# Altium PCB PCB1.PcbDoc (part 4 of 12)
Units mm, origin at the board's own origin, x right, y up, seen from the top; angles counter-clockwise.
Board outline 122.17 x 121.67 mm, 2 copper layers (Top Layer, Bottom Layer); 274 components, 225 nets, 941 pads, 421 vias.
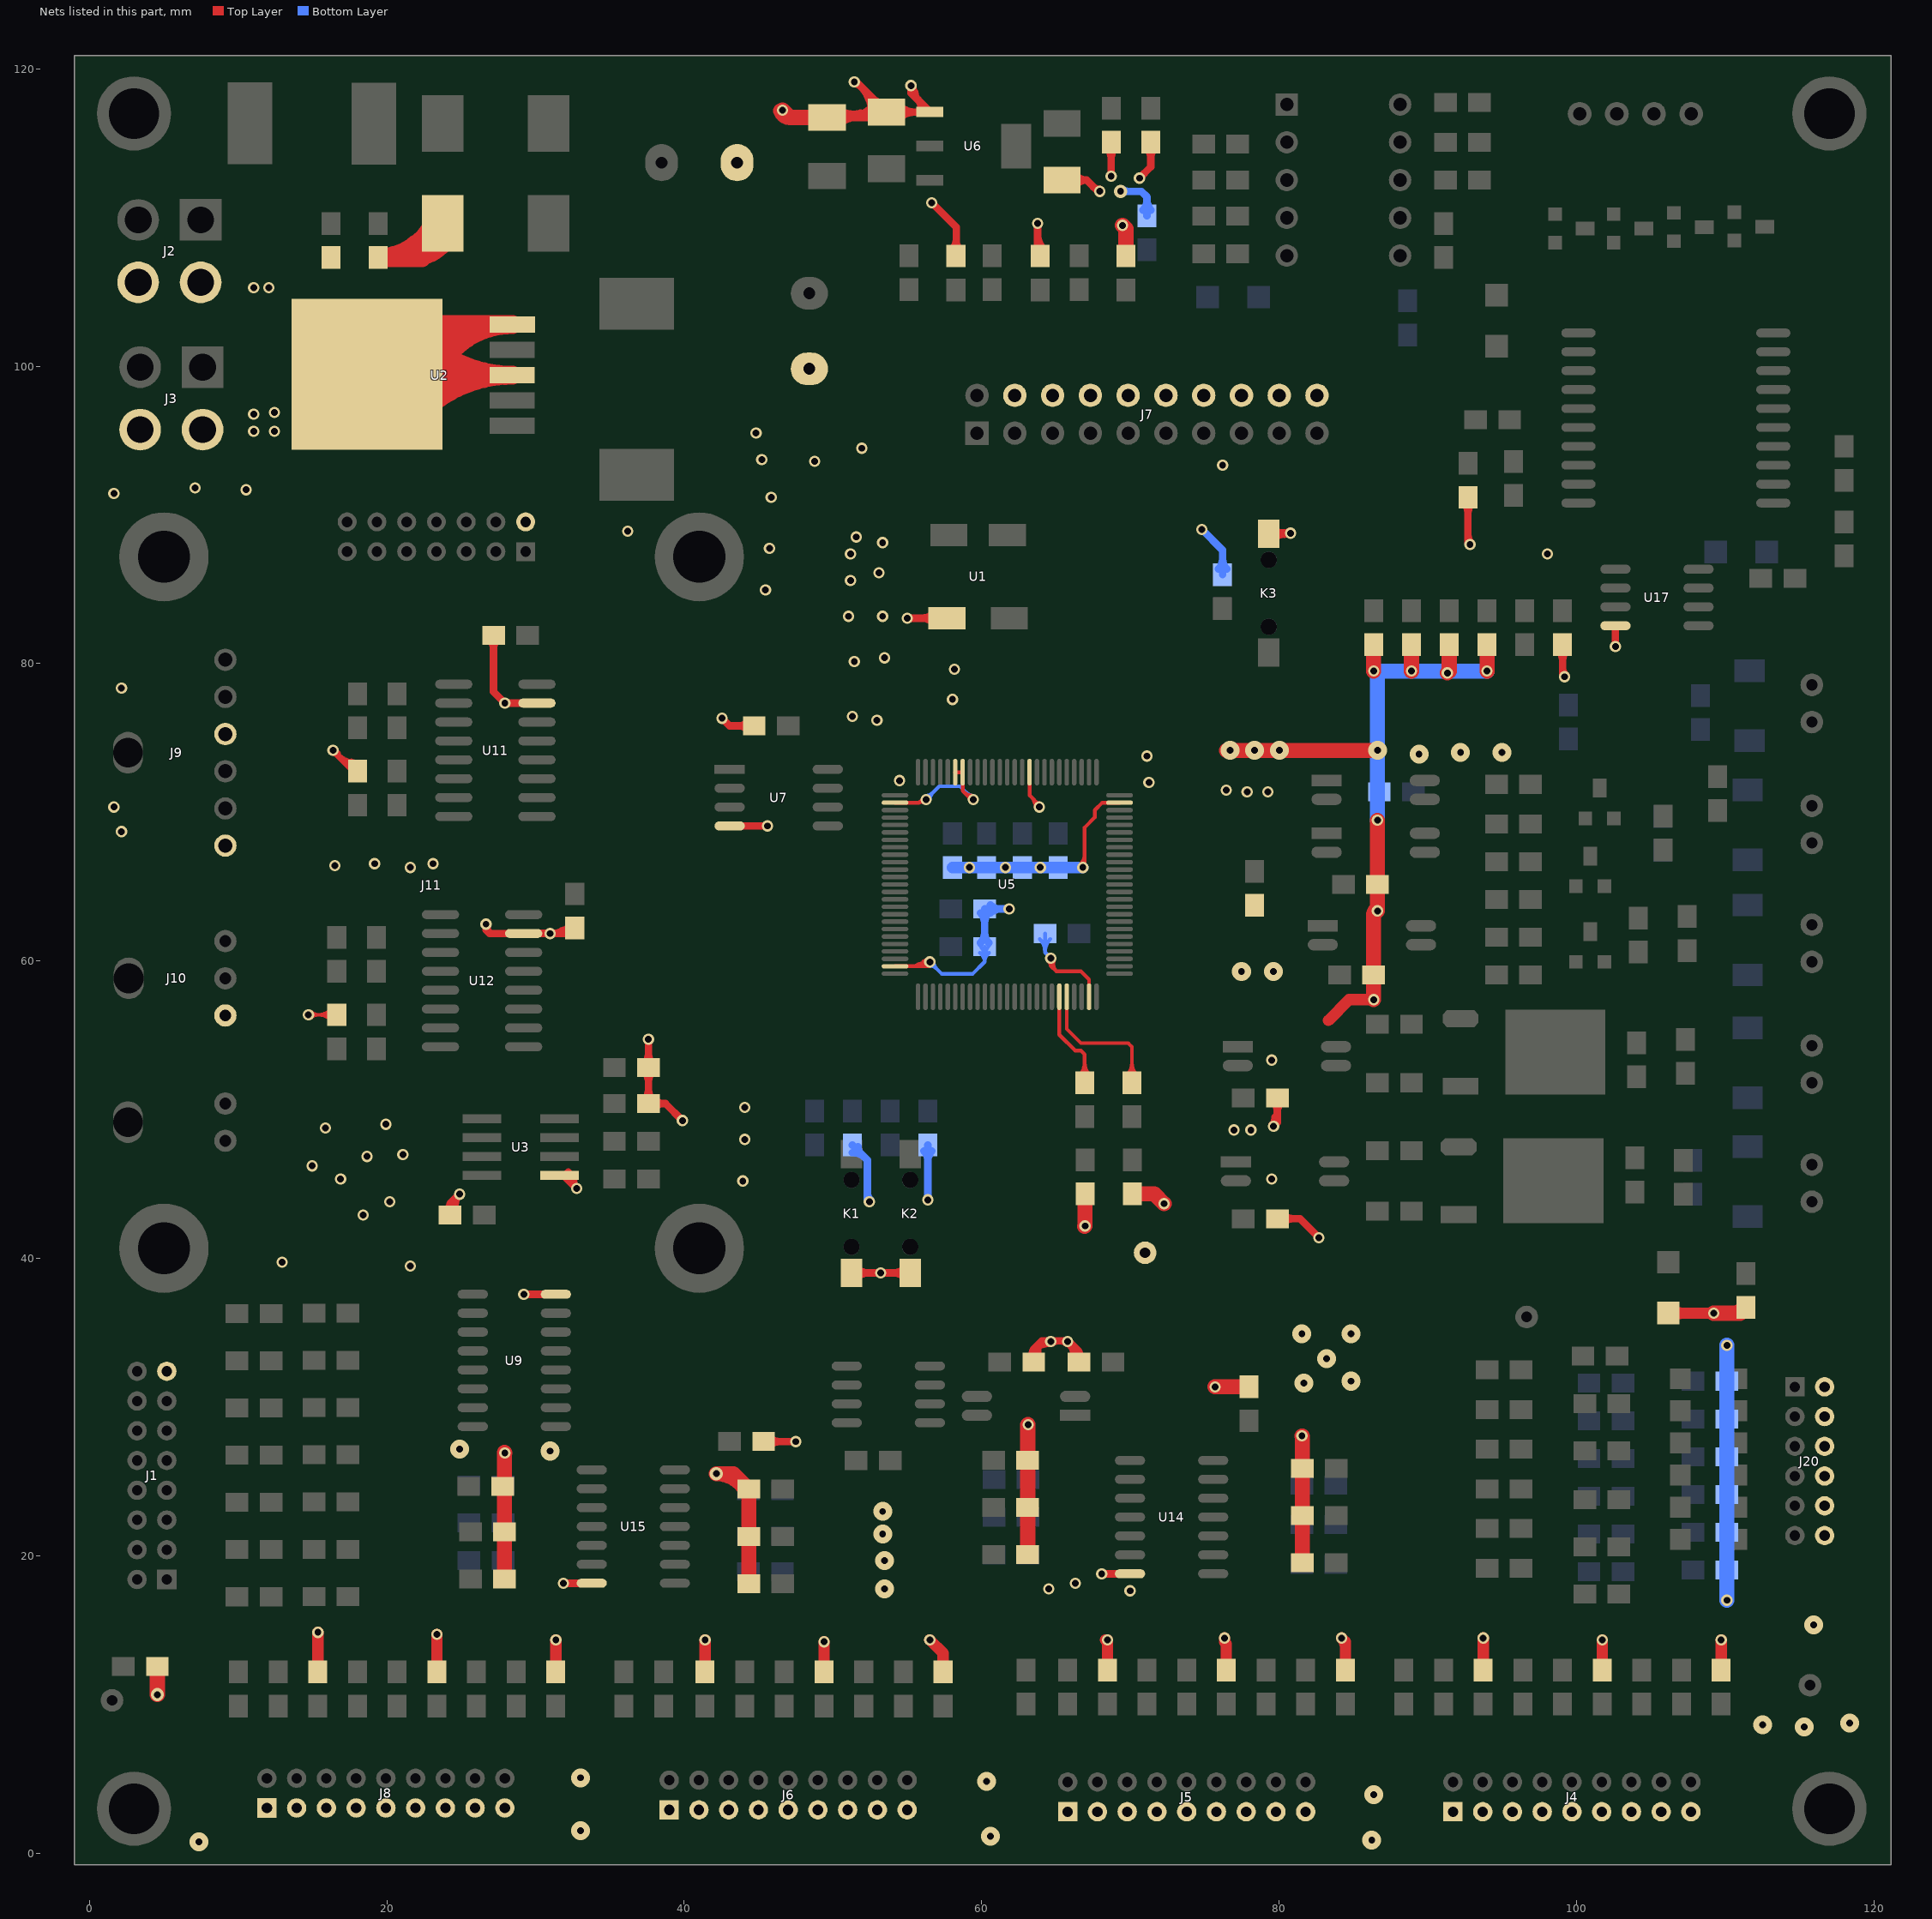
[diagram p4: the nets of this part, all layers, seen from the top]

## Via types
v1: diameter 0.762, hole 0.457, Top Layer to Bottom Layer, 339 vias
v2: diameter 1.27, hole 0.457, Top Layer to Bottom Layer, 39 vias
v3: diameter 0.889, hole 0.457, Top Layer to Bottom Layer, 21 vias
v4: diameter 1.27, hole 0.711, Top Layer to Bottom Layer, 12 vias
v5: diameter 1.524, hole 0.711, Top Layer to Bottom Layer, 5 vias
v6: diameter 1.016, hole 0.457, Top Layer to Bottom Layer, 3 vias
v7: diameter 0.711, hole 0.457, Top Layer to Bottom Layer, 1 vias
v8: diameter 1.524, hole 0.457, Top Layer to Bottom Layer, 1 vias

## Nets (pads, with @x,y where several pads share a name; then routed paths per layer and width w, separated by ;. In a path a pad name is that pad's centre, name@x,y a point inside that pad or via, vN(x,y) a via of type N, cw(c..) or ccw(c..) an arc to the next point about the centre after c; other vN are vias at no path point) (continued)
GND: C1.2 C2.1 C3.2 C4.2 C5.1 C7.2 C8.2 C9.2 C11.2 C12.2 C14.2 C16.2 C17.2 C18.2 C19.2 C20.2 C21.1 C22.1 C23.1 C24.1 C25.1 C26.2 C27.1 C28.2 C29.2 C30.2 C38.2 C39.2 C40.2 C41.2 C42.2 C43.2 C44.2 C45.2 C46.2 C47.2 C48.2 C49.2 C53.2 C55.2 C59.2 C60.2 C62.2 C63.2 C66.1 C68.2 C69.1 D8.2 D9.2 D10.2 D12.1 D13.1 D22.2 D23.2 D24.2 D25.2 D26.2 D27.2 D28.2 D29.2 D30.2 D31.2 D32.2 D33.2 D50.2 D51.2 J1.15 J2.2 J2.4 J3.2 J3.4 J4.1 J4.3 J4.5 J4.7 J4.9 J4.11 J4.13 J4.15 J4.17 J5.1 J5.3 J5.5 J5.7 J5.9 J5.11 J5.13 J5.15 J5.17 J6.1 J6.3 J6.5 J6.7 J6.9 J6.11 J6.13 J6.15 J6.17 J7.4 J7.6 J7.8 J7.10 J7.12 J7.14 J7.16 J7.18 J7.20 J8.1 J8.3 J8.5 J8.7 J8.9 J8.11 J8.13 J8.15 J8.17 J9.3 J9.6 J10.3 J11.2 J20.2 J20.4 J20.6 J20.8 J20.10 J20.12 K1.1 K2.1 K3.1 pad.2@70.993,40.386 R23.2 R24.1 R56.1 R58.1 R64.1 R77.2 R78.2 R92.2 R93.2 R94.1 R99.1 R100.1 R101.1 R106.2 R109.2 R111.2 R118.1 U1.2 U2.0 U2.3 U2.5 U3.5 U5.10 U5.19 U5.20 U5.27 U5.49 U5.74 U5.99 U6.1 U7.4 U9.8 U11.15 U12.15 U14.7 U15.7 U17.4 | length 1021.2
  Top Layer w0.254: v1(14.732,56.388) C55.2@16.637,56.388 ; C53.2@18.034,72.771 17.653,72.771 v1@16.383,74.041 ; U5.49@54.172,59.651 56.476,59.651 56.515,59.69 v1(56.515,59.944) ; U5.27@54.172,70.651 55.792,70.651 ; v1(56.261,70.866) 56.007,70.866 55.792,70.651 ; U5.20@58.222,72.701 U5.19@58.722,72.701 58.722,71.453 59.309,70.866 v1(59.436,70.866) ; 58.786,71.389 ccw(c59.436,72.04) v1@59.436,71.12 ; 59.092,71.083 cw(c58.875,70.866) v1@59.182,70.866 ; U5.10@63.222,72.701 63.222,71.144 63.881,70.485 v1(63.881,70.358) ; v1(66.802,66.294) 66.929,66.421 66.929,68.986 67.615,69.672 67.615,70.155 68.111,70.651 U5.99@69.272,70.651 ; U5.74@67.222,57.601 67.222,58.761 66.674,59.309 65.024,59.309 ; v1@14.912,56.208 cw(c15.345,55.775) 15.345,56.388 ; v1@14.912,56.208 cw(c15.345,55.775) 15.345,56.388 ; v1@14.912,56.208 cw(c15.345,55.775) 15.345,56.388 ; v1@14.912,56.208 cw(c15.345,55.775) 15.345,56.388 ; v1@14.912,56.568 ccw(c15.345,57.001) 15.345,56.388 ; v1@14.912,56.568 ccw(c15.345,57.001) 15.345,56.388 ; v1@14.912,56.568 ccw(c15.345,57.001) 15.345,56.388 ; v1@14.912,56.568 ccw(c15.345,57.001) 15.345,56.388 ; 15.411,56.388 cw(c15.411,55.162) C55.2@16.278,56.029 ; 15.411,56.388 ccw(c15.411,57.614) C55.2@16.278,56.747 ; 15.411,56.388 cw(c15.411,55.162) C55.2@16.278,56.029 ; 15.411,56.388 ccw(c15.411,57.614) C55.2@16.278,56.747 ; 15.411,56.388 cw(c15.411,55.162) C55.2@16.278,56.029 ; 15.411,56.388 ccw(c15.411,57.614) C55.2@16.278,56.747 ; 15.411,56.388 cw(c15.411,55.162) C55.2@16.278,56.029 ; 15.411,56.388 ccw(c15.411,57.614) C55.2@16.278,56.747 ; v1@16.383,73.914 cw(c16.383,73.607) 16.6,73.824 ; v1@16.383,73.914 cw(c16.383,73.607) 16.6,73.824 ; v1@16.383,73.914 cw(c16.383,73.607) 16.6,73.824 ; v1@16.383,74.041 ccw(c17.922,75.579) C53.2@18.013,73.406 ; v1@16.383,74.041 ccw(c17.922,75.579) C53.2@18.013,73.406 ; v1@16.383,74.041 ccw(c17.922,75.579) C53.2@18.013,73.406 ; v1@16.383,74.041 v1(16.383,74.168) ; v1(16.383,74.168) cw(c16.446,73.796) 16.772,73.985 ; v1(16.383,74.168) cw(c16.18,73.622) 16.743,73.773 ; v1(16.383,74.168) cw(c16.446,73.796) 16.772,73.985 ; v1(16.383,74.168) cw(c16.446,73.796) 16.772,73.985 ; v1(16.383,74.168) cw(c16.18,73.622) 16.743,73.773 ; v1(16.383,74.168) cw(c16.446,73.796) 16.772,73.985 ; v1(16.383,74.168) cw(c16.18,73.622) 16.743,73.773 ; v1@16.628,74.234 ccw(c17.583,74.49) 17.089,73.633 ; v1@16.628,74.234 ccw(c17.583,74.49) 17.089,73.633 ; v1@16.628,74.234 ccw(c17.583,74.49) 17.089,73.633 ; v1@16.628,74.234 ccw(c17.583,74.49) 17.089,73.633 ; v1@16.628,74.234 ccw(c17.583,74.49) 17.089,73.633 ; v1@16.628,74.234 ccw(c17.583,74.49) 17.089,73.633 ; v1@16.637,74.168 ccw(c17.557,74.168) 16.906,73.518 ; v1@16.637,74.168 ccw(c17.557,74.168) 16.906,73.518 ; v1@16.637,74.168 ccw(c17.557,74.168) 16.906,73.518 ; 16.792,73.632 ccw(c17.955,74.794) C53.2@18.023,73.152 ; 16.792,73.632 ccw(c17.955,74.794) C53.2@18.023,73.152 ; 16.792,73.632 ccw(c17.955,74.794) C53.2@18.023,73.152 ; 17.038,73.623 cw(c16.701,72.114) C53.2@18.034,72.898 ; 17.038,73.623 cw(c16.701,72.114) C53.2@18.034,72.898 ; 17.038,73.623 cw(c16.701,72.114) C53.2@18.034,72.898 ; 17.157,73.345 cw(c16.96,72.462) C53.2@17.799,72.802 ; 17.157,73.345 cw(c16.96,72.462) C53.2@17.799,72.802 ; 17.157,73.345 cw(c16.96,72.462) C53.2@17.799,72.802 ; 17.201,73.223 ccw(c17.987,74.009) C53.2@18.034,72.898 ; 17.201,73.223 ccw(c17.987,74.009) C53.2@18.034,72.898 ; 17.201,73.223 ccw(c17.987,74.009) C53.2@18.034,72.898 ; C53.2@17.469,73.276 ccw(c17.553,73.655) C53.2@17.762,73.327 ; C53.2@17.469,73.276 ccw(c17.553,73.655) C53.2@17.762,73.327 ; C53.2@17.469,73.276 ccw(c17.553,73.655) C53.2@17.762,73.327 ; C53.2@17.609,73.496 cw(c17.391,72.52) C53.2@18.253,73.027 ; C53.2@17.609,73.496 cw(c17.391,72.52) C53.2@18.253,73.027 ; C53.2@17.609,73.496 cw(c17.391,72.52) C53.2@18.253,73.027 ; 55.194,59.651 ccw(c55.194,61.265) v1@56.335,60.124 ; 55.194,59.651 ccw(c55.194,61.265) v1@56.335,60.124 ; 55.194,59.651 ccw(c55.194,61.265) v1@56.335,60.124 ; 55.194,59.651 ccw(c55.194,61.265) v1@56.335,60.124 ; 55.735,59.777 cw(c56.021,59.281) v1@56.363,59.74 ; 55.735,59.777 cw(c56.021,59.281) v1@56.363,59.74 ; 55.735,59.777 cw(c56.021,59.281) v1@56.363,59.74 ; 55.735,59.777 cw(c56.021,59.281) v1@56.363,59.74 ; 55.735,59.777 cw(c56.021,59.281) v1@56.363,59.74 ; 55.735,59.777 cw(c56.021,59.281) v1@56.363,59.74 ; 55.792,70.651 cw(c55.956,70.487) v1@56.102,70.668 ; 55.792,70.651 cw(c55.956,70.487) v1@56.102,70.668 ; 55.792,70.651 cw(c55.956,70.487) v1@56.102,70.668 ; 55.792,70.651 cw(c55.956,70.487) v1@56.102,70.668 ; 55.808,59.651 ccw(c55.808,60.651) v1(56.515,59.944) ; 55.808,59.651 ccw(c55.808,60.651) v1(56.515,59.944) ; 55.808,59.651 ccw(c55.808,60.651) v1(56.515,59.944) ; 55.808,59.651 ccw(c55.808,60.651) v1(56.515,59.944) ; 56.067,59.685 cw(c56.267,59.338) v1@56.419,59.709 ; 56.067,59.685 ccw(c55.866,60.032) v1@56.263,59.978 ; 56.067,59.685 cw(c56.267,59.338) v1@56.419,59.709 ; 56.067,59.685 ccw(c55.866,60.032) v1@56.263,59.978 ; 56.067,59.685 cw(c56.267,59.338) v1@56.419,59.709 ; 56.067,59.685 ccw(c55.866,60.032) v1@56.263,59.978 ; 56.067,59.685 cw(c56.267,59.338) v1@56.419,59.709 ; 56.067,59.685 ccw(c55.866,60.032) v1@56.263,59.978 ; 56.067,59.685 cw(c56.267,59.338) v1@56.419,59.709 ; 56.067,59.685 ccw(c55.866,60.032) v1@56.263,59.978 ; 56.067,59.685 cw(c56.267,59.338) v1@56.419,59.709 ; 56.067,59.685 ccw(c55.866,60.032) v1@56.263,59.978 ; 56.069,59.97 cw(c56.272,59.618) v1(56.515,59.944) ; 56.069,59.97 cw(c56.272,59.618) v1(56.515,59.944) ; 56.069,59.97 cw(c56.272,59.618) v1(56.515,59.944) ; 56.069,59.97 cw(c56.272,59.618) v1(56.515,59.944) ; 56.069,59.97 cw(c56.272,59.618) v1(56.515,59.944) ; 56.069,59.97 cw(c56.272,59.618) v1(56.515,59.944) ; 63.358,71.008 cw(c62.707,70.358) v1@63.627,70.358 ; 63.358,71.008 cw(c62.707,70.358) v1@63.627,70.358 ; 63.358,71.008 cw(c62.707,70.358) v1@63.627,70.358 ; 63.358,71.008 cw(c62.707,70.358) v1@63.627,70.358 ; 63.521,70.753 ccw(c64.084,70.904) v1(63.881,70.358) ; 63.521,70.753 ccw(c64.084,70.904) v1(63.881,70.358) ; 63.521,70.753 ccw(c64.084,70.904) v1(63.881,70.358) ; 63.521,70.753 ccw(c64.084,70.904) v1(63.881,70.358) ; 63.521,70.753 ccw(c64.084,70.904) v1(63.881,70.358) ; 63.521,70.753 ccw(c64.084,70.904) v1(63.881,70.358) ; 63.664,70.702 ccw(c63.881,70.919) v1@63.881,70.612 ; 63.664,70.702 ccw(c63.881,70.919) v1@63.881,70.612 ; 63.664,70.702 ccw(c63.881,70.919) v1@63.881,70.612 ; 63.664,70.702 ccw(c63.881,70.919) v1@63.881,70.612 ; v1@64.491,59.995 cw(c64.262,59.69) 64.643,59.69 ; v1@64.491,59.995 cw(c64.262,59.69) 64.643,59.69 ; v1@64.491,59.995 cw(c64.262,59.69) 64.643,59.69 ; v1@64.491,59.995 cw(c64.262,59.69) 64.643,59.69 ; 64.643,59.69 cw(c65.024,59.69) v1@64.795,59.995 ; 64.643,59.69 cw(c65.024,59.69) v1@64.795,59.995 ; 64.643,59.69 cw(c65.024,59.69) v1@64.795,59.995 ; 64.643,59.69 cw(c65.024,59.69) v1@64.795,59.995 ; 64.643,59.69 65.024,59.309 ; 64.643,59.69 v1(64.643,60.198) ; v1(64.643,60.198) ccw(c65.16,59.971) 64.761,59.572 ; v1(64.643,60.198) ccw(c65.16,59.971) 64.761,59.572 ; v1(64.643,60.198) ccw(c65.16,59.971) 64.761,59.572 ; v1(64.643,60.198) ccw(c65.16,59.971) 64.761,59.572 ; v1@64.876,60.096 ccw(c65.526,59.811) 65.024,59.309 ; v1@64.876,60.096 ccw(c65.526,59.811) 65.024,59.309 ; v1@64.876,60.096 ccw(c65.526,59.811) 65.024,59.309 ; v1@64.876,60.096 ccw(c65.526,59.811) 65.024,59.309 ; v1@66.622,66.474 ccw(c65.882,67.214) 66.929,67.214 ; v1@66.622,66.474 ccw(c65.882,67.214) 66.929,67.214 ; v1@66.622,66.474 ccw(c65.882,67.214) 66.929,67.214 ; v1@66.622,66.474 ccw(c65.882,67.214) 66.929,67.214
  Top Layer w0.508: R58.1@24.257,42.926 24.257,43.688 ; 26.67,62.103 26.92,61.853 ; C59.2@27.178,81.915 27.178,78.105 v1(27.94,77.343) 28.067,77.343 28.071,77.347 U11.15@30.095,77.347 ; U12.15@29.201,61.856 32.265,61.856 C60.2@32.639,62.23 ; U12.15@29.206,61.853 26.92,61.853 ; v1(29.21,37.592) U9.8@31.369,37.592 ; U3.5@31.607,45.593 31.877,45.593 v1(32.766,44.704) ; 31.764,62.022 cw(c31.973,61.66) C60.2@32.322,61.892 ; v1(31.877,18.161) U15.7@33.782,18.161 ; v1(37.592,54.737) C30.2@37.592,52.832 R56.1@37.592,50.419 38.735,50.419 v1(39.878,49.276) ; v1(42.545,76.327) 43.053,75.819 C29.2@44.704,75.819 ; U7.4@43.053,69.088 v1(45.593,69.088) ; C63.2@45.339,27.686 v1(47.498,27.686) ; D12.1@49.599,116.728 53.228,116.728 C19.2@53.594,117.094 ; K1.1@51.25,39.031 K2.1@55.187,39.031 ; v1(51.435,119.126) 51.562,119.126 C19.2@53.594,117.094 ; v1(54.991,83.058) 54.993,83.06 U1.2@57.67,83.06 ; v1(55.245,118.872) 55.245,118.378 U6.1@56.515,117.108 56.501,117.094 C19.2@53.594,117.094 ; 55.924,117.699 cw(c55.334,117.108) U6.1@56.169,117.108 ; v1(56.642,110.998) 58.293,109.347 D10.2@58.293,107.95 ; R118.1@63.5,33.02 63.5,33.909 ; D8.2@63.65,107.626 63.754,107.522 v1(63.754,109.601) ; C18.2@65.405,112.522 67.056,112.522 ; R23.2@66.548,33.02 66.548,33.731 ; v1(67.945,111.76) 67.945,111.633 67.056,112.522 ; v1(68.072,18.796) U14.7@69.977,18.796 ; v1(68.707,112.776) C20.2@68.707,115.062 ; v1(70.612,112.649) 71.374,113.411 C26.2@71.374,115.062 ; K3.1@79.306,88.731 80.73,88.731 v1(80.772,88.773) ; v1(79.629,48.895) 79.883,49.149 R93.2@79.883,50.8 ; R109.2@79.883,42.672 81.407,42.672 v1(82.677,41.402) ; C66.1@92.695,90.917 92.695,88.153 v1(92.837,88.011) ; R111.2@99.06,81.28 99.06,79.121 v1(99.187,79.121) ; v1(102.616,81.153) U17.4@102.616,82.55 ; R58.1@24.028,43.231 ccw(c23.686,43.688) 24.257,43.688 ; R58.1@24.028,43.231 ccw(c23.686,43.688) 24.257,43.688 ; R58.1@24.028,43.231 ccw(c23.686,43.688) 24.257,43.688 ; 24.257,43.688 ccw(c24.828,43.688) R58.1@24.486,43.231 ; 24.257,43.688 ccw(c24.828,43.688) R58.1@24.486,43.231 ; 24.257,43.688 ccw(c24.828,43.688) R58.1@24.486,43.231 ; 24.257,43.688 v1(24.892,44.323) ; R58.1@24.273,42.865 cw(c24.996,43.261) 24.413,43.844 ; R58.1@24.273,42.865 cw(c24.996,43.261) 24.413,43.844 ; R58.1@24.273,42.865 cw(c24.996,43.261) 24.413,43.844 ; R58.1@24.718,43.109 cw(c25.615,43.6) v1(24.892,44.323) ; R58.1@24.718,43.109 cw(c25.615,43.6) v1(24.892,44.323) ; R58.1@24.718,43.109 cw(c25.615,43.6) v1(24.892,44.323) ; v1@26.789,62.441 ccw(c27.317,62.25) 26.92,61.853 ; v1@26.789,62.441 ccw(c27.317,62.25) 26.92,61.853 ; v1@26.789,62.441 ccw(c27.317,62.25) 26.92,61.853 ; 27.178,80.995 cw(c28.098,80.995) 27.447,81.646 ccw(c28.098,80.995) 27.178,80.995 ; 27.178,80.995 ccw(c26.258,80.995) 26.909,81.646 cw(c26.258,80.995) 27.178,80.995 ; U3.5@32.647,45.57 ccw(c33.278,45.216) v1(32.766,44.704) ; U3.5@32.647,45.57 ccw(c33.278,45.216) v1(32.766,44.704) ; U3.5@32.647,45.57 ccw(c33.278,45.216) v1(32.766,44.704) ; C30.2@37.323,52.563 cw(c36.672,51.912) 37.592,51.912 ; C30.2@37.323,52.563 cw(c36.672,51.912) 37.592,51.912 ; C30.2@37.323,52.563 cw(c36.672,51.912) 37.592,51.912 ; C30.2@37.323,53.101 ccw(c36.672,53.752) 37.592,53.752 ; C30.2@37.323,53.101 ccw(c36.672,53.752) 37.592,53.752 ; C30.2@37.323,53.101 ccw(c36.672,53.752) 37.592,53.752 ; 37.592,51.339 cw(c36.672,51.339) 37.323,50.688 ccw(c36.672,51.339) 37.592,51.339 ; 37.592,51.339 ccw(c38.512,51.339) 37.861,50.688 cw(c38.512,51.339) 37.592,51.339 ; 37.592,51.912 cw(c38.512,51.912) C30.2@37.861,52.563 ; 37.592,51.912 cw(c38.512,51.912) C30.2@37.861,52.563 ; 37.592,51.912 cw(c38.512,51.912) C30.2@37.861,52.563 ; 37.592,53.752 ccw(c38.512,53.752) C30.2@37.861,53.101 ; 37.592,53.752 ccw(c38.512,53.752) C30.2@37.861,53.101 ; 37.592,53.752 ccw(c38.512,53.752) C30.2@37.861,53.101 ; 38.639,50.419 cw(c38.639,51.339) 37.988,50.688 ccw(c38.639,51.339) 38.639,50.419 ; 38.639,50.419 ccw(c38.639,49.499) 37.988,50.15 cw(c38.639,49.499) 38.639,50.419 ; 43.657,75.819 cw(c43.657,74.899) 44.308,75.55 ccw(c43.657,74.899) 43.657,75.819 ; 43.657,75.819 ccw(c43.657,76.739) 44.308,76.088 cw(c43.657,76.739) 43.657,75.819 ; C63.2@45.735,27.417 cw(c46.386,26.766) 46.386,27.686 ; C63.2@45.735,27.417 cw(c46.386,26.766) 46.386,27.686 ; C63.2@45.735,27.417 cw(c46.386,26.766) 46.386,27.686 ; C63.2@45.735,27.417 cw(c46.386,26.766) 46.386,27.686 ; C63.2@45.735,27.955 ccw(c46.386,28.606) 46.386,27.686 ; C63.2@45.735,27.955 ccw(c46.386,28.606) 46.386,27.686 ; C63.2@45.735,27.955 ccw(c46.386,28.606) 46.386,27.686 ; C63.2@45.735,27.955 ccw(c46.386,28.606) 46.386,27.686 ; D12.1@50.331,117.257 ccw(c51.365,118.817) 51.85,117.009 ; D12.1@50.331,117.257 ccw(c51.365,118.817) 51.85,117.009 ; D12.1@50.331,117.257 ccw(c51.365,118.817) 51.85,117.009 ; D12.1@50.331,117.257 ccw(c51.365,118.817) 51.85,117.009 ; D12.1@50.331,117.257 ccw(c51.365,118.817) 51.85,117.009 ; D12.1@50.331,117.257 ccw(c51.365,118.817) 51.85,117.009 ; D12.1@50.331,117.257 ccw(c51.365,118.817) 51.85,117.009 ; D12.1@50.429,116.279 cw(c51.513,115.195) 51.513,116.728 ; D12.1@50.429,116.279 cw(c51.513,115.195) 51.513,116.728 ; D12.1@50.429,116.279 cw(c51.513,115.195) 51.513,116.728 ; D12.1@50.429,116.279 cw(c51.513,115.195) 51.513,116.728 ; D12.1@50.429,117.177 ccw(c51.513,118.261) 51.513,116.728 ; D12.1@50.429,117.177 ccw(c51.513,118.261) 51.513,116.728 ; D12.1@50.429,117.177 ccw(c51.513,118.261) 51.513,116.728 ; D12.1@50.429,117.177 ccw(c51.513,118.261) 51.513,116.728 ; D12.1@50.53,116.411 cw(c51.228,116.007) 51.019,116.787 ; D12.1@50.53,116.411 cw(c51.228,116.007) 51.019,116.787 ; D12.1@50.53,116.411 cw(c51.228,116.007) 51.019,116.787 ; D12.1@50.53,116.411 cw(c51.228,116.007) 51.019,116.787 ; D12.1@50.53,116.411 cw(c51.228,116.007) 51.019,116.787 ; D12.1@50.53,116.411 cw(c51.228,116.007) 51.019,116.787 ; D12.1@50.53,116.411 cw(c51.228,116.007) 51.019,116.787 ; D12.1@50.802,116.728 ccw(c50.802,119.536) C19.2@52.787,117.551 ; D12.1@50.802,116.728 ccw(c50.802,119.536) C19.2@52.787,117.551 ; D12.1@50.802,116.728 ccw(c50.802,119.536) C19.2@52.787,117.551 ; D12.1@50.802,116.728 ccw(c50.802,119.536) C19.2@52.787,117.551 ; v1@51.435,118.999 cw(c51.435,118.386) 51.869,118.819 ; v1@51.435,118.999 cw(c51.435,118.386) 51.869,118.819 ; v1@51.435,118.999 cw(c51.435,118.386) 51.869,118.819 ; v1@51.435,118.999 cw(c51.435,118.386) 51.869,118.819 ; K1.1@51.58,38.702 cw(c52.375,37.906) 52.375,39.031 ; K1.1@51.58,38.702 cw(c52.375,37.906) 52.375,39.031 ; K1.1@51.58,38.702 cw(c52.375,37.906) 52.375,39.031 ; K1.1@51.58,39.361 ccw(c52.375,40.156) 52.375,39.031 ; K1.1@51.58,39.361 ccw(c52.375,40.156) 52.375,39.031 ; K1.1@51.58,39.361 ccw(c52.375,40.156) 52.375,39.031 ; 51.894,118.794 cw(c50.193,117.094) C19.2@52.598,117.094 ; 51.894,118.794 cw(c50.193,117.094) C19.2@52.598,117.094 ; 51.894,118.794 cw(c50.193,117.094) C19.2@52.598,117.094 ; 51.894,118.794 cw(c50.193,117.094) C19.2@52.598,117.094 ; 52.028,116.728 ccw(c52.028,118.31) C19.2@53.146,117.192 ; 52.028,116.728 ccw(c52.028,118.31) C19.2@53.146,117.192 ; 52.028,116.728 ccw(c52.028,118.31) C19.2@53.146,117.192 ; 52.028,116.728 ccw(c52.028,118.31) C19.2@53.146,117.192 ; 52.254,118.377 ccw(c53.907,118.82) C19.2@53.293,117.223 ; 52.254,118.377 ccw(c53.907,118.82) C19.2@53.293,117.223 ; 52.254,118.377 ccw(c53.907,118.82) C19.2@53.293,117.223 ; 52.254,118.377 ccw(c53.907,118.82) C19.2@53.293,117.223 ; 52.254,118.377 ccw(c53.907,118.82) C19.2@53.293,117.223 ; 52.254,118.377 ccw(c53.907,118.82) C19.2@53.293,117.223 ; C19.2@52.739,117.949 ccw(c53.244,118.455) C19.2@53.244,117.74 ; C19.2@52.739,117.949 ccw(c53.244,118.455) C19.2@53.244,117.74 ; C19.2@52.739,117.949 ccw(c53.244,118.455) C19.2@53.244,117.74 ; C19.2@52.739,117.949 ccw(c53.244,118.455) C19.2@53.244,117.74 ; C19.2@52.761,117.927 cw(c51.928,117.094) C19.2@53.106,117.094 ; C19.2@52.761,117.927 cw(c51.928,117.094) C19.2@53.106,117.094 ; C19.2@52.761,117.927 cw(c51.928,117.094) C19.2@53.106,117.094 ; C19.2@52.761,117.927 cw(c51.928,117.094) C19.2@53.106,117.094 ; 54.062,39.031 cw(c54.062,37.906) K2.1@54.858,38.702 ; 54.062,39.031 ccw(c54.062,40.156) K2.1@54.858,39.361 ; 54.062,39.031 cw(c54.062,37.906) K2.1@54.858,38.702 ; 54.062,39.031 ccw(c54.062,40.156) K2.1@54.858,39.361 ; 54.062,39.031 cw(c54.062,37.906) K2.1@54.858,38.702 ; 54.062,39.031 ccw(c54.062,40.156) K2.1@54.858,39.361 ; C19.2@54.401,116.637 cw(c55.504,115.534) 55.504,117.094 ; C19.2@54.401,116.637 cw(c55.504,115.534) 55.504,117.094 ; C19.2@54.401,116.637 cw(c55.504,115.534) 55.504,117.094 ; C19.2@54.401,116.637 cw(c55.504,115.534) 55.504,117.094 ; C19.2@54.401,117.551 ccw(c55.504,118.654) 55.504,117.094 ; C19.2@54.401,117.551 ccw(c55.504,118.654) 55.504,117.094 ; C19.2@54.401,117.551 ccw(c55.504,118.654) 55.504,117.094 ; C19.2@54.401,117.551 ccw(c55.504,118.654) 55.504,117.094 ; v1@55.182,118.762 cw(c54.819,118.134) 55.52,118.322 ; v1@55.182,118.762 cw(c54.819,118.134) 55.52,118.322 ; v1@55.182,118.762 cw(c54.819,118.134) 55.52,118.322 ; v1@55.182,118.762 cw(c54.819,118.134) 55.52,118.322 ; v1@55.182,118.762 cw(c54.819,118.134) 55.52,118.322 ; v1@55.182,118.762 cw(c54.819,118.134) 55.52,118.322 ; v1@55.366,118.833 ccw(c55.682,118.731) 55.447,118.496 ; v1@55.366,118.833 ccw(c55.682,118.731) 55.447,118.496 ; v1@55.366,118.833 ccw(c55.682,118.731) 55.447,118.496 ; v1@55.366,118.833 ccw(c55.682,118.731) 55.447,118.496 ; v1@55.372,118.872 ccw(c56.871,118.872) 55.811,117.812 ; v1@55.372,118.872 ccw(c56.871,118.872) 55.811,117.812 ; v1@55.372,118.872 ccw(c56.871,118.872) 55.811,117.812 ; v1@55.372,118.872 ccw(c56.871,118.872) 55.811,117.812 ; 55.668,117.955 cw(c54.822,117.108) U6.1@56.019,117.108 ; 55.668,117.955 cw(c54.822,117.108) U6.1@56.019,117.108 ; 55.668,117.955 cw(c54.822,117.108) U6.1@56.019,117.108 ; 55.908,117.524 ccw(c56.437,117.666) U6.1@56.163,117.191 ; 55.908,117.524 ccw(c56.437,117.666) U6.1@56.163,117.191 ; 55.908,117.524 ccw(c56.437,117.666) U6.1@56.163,117.191 ; 55.973,83.06 cw(c55.973,81.862) U1.2@56.819,82.709 ; 55.973,83.06 ccw(c55.973,84.257) U1.2@56.819,83.411 ; 55.973,83.06 cw(c55.973,81.862) U1.2@56.819,82.709 ; 55.973,83.06 ccw(c55.973,84.257) U1.2@56.819,83.411 ; 55.973,83.06 cw(c55.973,81.862) U1.2@56.819,82.709 ; 55.973,83.06 ccw(c55.973,84.257) U1.2@56.819,83.411 ; R118.1@63.237,33.296 ccw(c62.653,33.909) 63.5,33.909 ; R118.1@63.237,33.296 ccw(c62.653,33.909) 63.5,33.909 ; R118.1@63.237,33.296 ccw(c62.653,33.909) 63.5,33.909 ; 63.5,33.909 cw(c64.45,32.959) v1@64.626,34.291 ; 63.5,33.909 ccw(c64.347,33.909) R118.1@63.763,33.296 ; 63.5,33.909 cw(c64.45,32.959) v1@64.626,34.291 ; 63.5,33.909 ccw(c64.347,33.909) R118.1@63.763,33.296 ; 63.5,33.909 cw(c64.45,32.959) v1@64.626,34.291 ; 63.5,33.909 ccw(c64.347,33.909) R118.1@63.763,33.296 ; 63.5,33.909 64.046,34.455 ; R118.1@63.523,32.947 cw(c64.214,33.43) 63.618,34.027 ; R118.1@63.523,32.947 cw(c64.214,33.43) 63.618,34.027 ; R118.1@63.523,32.947 cw(c64.214,33.43) 63.618,34.027 ; R118.1@63.939,33.238 cw(c64.718,33.783) 64.046,34.455 ; R118.1@63.939,33.238 cw(c64.718,33.783) 64.046,34.455 ; R118.1@63.939,33.238 cw(c64.718,33.783) 64.046,34.455 ; 64.046,34.455 v1@65.824,34.455 ; 64.061,34.217 ccw(c63.967,34.936) v1@64.542,34.494 ; 64.061,34.217 ccw(c63.967,34.936) v1@64.542,34.494 ; 64.061,34.217 ccw(c63.967,34.936) v1@64.542,34.494 ; 64.244,34.455 cw(c64.244,34.018) v1@64.553,34.327 ; 64.244,34.455 cw(c64.244,34.018) v1@64.553,34.327 ; 64.244,34.455 cw(c64.244,34.018) v1@64.553,34.327 ; v1@64.733,34.327 cw(c65.042,34.018) 65.042,34.455 ; v1@64.733,34.327 cw(c65.042,34.018) 65.042,34.455 ; v1@64.733,34.327 cw(c65.042,34.018) 65.042,34.455 ; 65.387,34.455 cw(c65.387,34.018) v1@65.696,34.327 ; 65.387,34.455 cw(c65.387,34.018) v1@65.696,34.327 ; 65.387,34.455 cw(c65.387,34.018) v1@65.696,34.327 ; v1@65.753,34.294 cw(c65.628,33.826) 66.047,34.069 ; v1@65.753,34.294 cw(c65.628,33.826) 66.047,34.069 ; v1@65.753,34.294 cw(c65.628,33.826) 66.047,34.069 ; v1@65.753,34.294 cw(c65.628,33.826) 66.047,34.069 ; v1@65.753,34.294 cw(c65.628,33.826) 66.047,34.069 ; v1@65.753,34.294 cw(c65.628,33.826) 66.047,34.069 ; v1@65.786,34.29 cw(c65.786,33.799) 66.133,34.146 ; v1@65.786,34.29 cw(c65.786,33.799) 66.133,34.146 ; v1@65.786,34.29 cw(c65.786,33.799) 66.133,34.146 ; v1@65.824,34.455 cw(c65,33.631) R23.2@66.071,33.17 ; v1@65.824,34.455 cw(c65,33.631) R23.2@66.071,33.17 ; v1@65.824,34.455 cw(c65,33.631) R23.2@66.071,33.17 ; v1@65.824,34.455 66.548,33.731 ; C18.2@66.27,112.132 cw(c67.056,111.535) 67.056,112.522 ; C18.2@66.27,112.132 cw(c67.056,111.535) 67.056,112.522 ; C18.2@66.27,112.132 cw(c67.056,111.535) 67.056,112.522 ; C18.2@66.27,112.132 cw(c67.056,111.535) 67.056,112.522 ; C18.2@66.27,112.912 ccw(c67.056,113.509) 67.056,112.522 ; C18.2@66.27,112.912 ccw(c67.056,113.509) 67.056,112.522 ; C18.2@66.27,112.912 ccw(c67.056,113.509) 67.056,112.522 ; C18.2@66.27,112.912 ccw(c67.056,113.509) 67.056,112.522 ; R23.2@66.337,33.337 ccw(c66.075,33.731) 66.548,33.731 ; R23.2@66.337,33.337 ccw(c66.075,33.731) 66.548,33.731 ; R23.2@66.337,33.337 ccw(c66.075,33.731) 66.548,33.731 ; 66.354,33.925 cw(c65.741,33.312) R23.2@66.538,32.97 ; 66.354,33.925 cw(c65.741,33.312) R23.2@66.538,32.97 ; 66.354,33.925 cw(c65.741,33.312) R23.2@66.538,32.97 ; 66.548,33.731 ccw(c67.021,33.731) R23.2@66.759,33.337 ; 66.548,33.731 ccw(c67.021,33.731) R23.2@66.759,33.337 ; 66.548,33.731 ccw(c67.021,33.731) R23.2@66.759,33.337 ; 67.511,112.067 ccw(c67.945,112.5) v1@67.945,111.887 ; 67.511,112.067 ccw(c67.945,112.5) v1@67.945,111.887 ; 67.511,112.067 ccw(c67.945,112.5) v1@67.945,111.887 ; 67.511,112.067 ccw(c67.945,112.5) v1@67.945,111.887 ; C20.2@68.438,114.666 cw(c67.787,114.015) 68.707,114.015 ; C20.2@68.438,114.666 cw(c67.787,114.015) 68.707,114.015 ; C20.2@68.438,114.666 cw(c67.787,114.015) 68.707,114.015 ; C20.2@68.438,114.666 cw(c67.787,114.015) 68.707,114.015 ; 68.707,114.015 cw(c69.627,114.015) C20.2@68.976,114.666 ; 68.707,114.015 cw(c69.627,114.015) C20.2@68.976,114.666 ; 68.707,114.015 cw(c69.627,114.015) C20.2@68.976,114.666 ; 68.707,114.015 cw(c69.627,114.015) C20.2@68.976,114.666 ; C26.2@71.105,114.666 cw(c70.454,114.015) 71.374,114.015 ; C26.2@71.105,114.666 cw(c70.454,114.015) 71.374,114.015 ; C26.2@71.105,114.666 cw(c70.454,114.015) 71.374,114.015 ; C26.2@71.105,114.666 cw(c70.454,114.015) 71.374,114.015 ; 71.374,114.015 cw(c72.294,114.015) C26.2@71.643,114.666 ; 71.374,114.015 cw(c72.294,114.015) C26.2@71.643,114.666 ; 71.374,114.015 cw(c72.294,114.015) C26.2@71.643,114.666 ; 71.374,114.015 cw(c72.294,114.015) C26.2@71.643,114.666 ; v1@79.536,48.981 ccw(c79.002,49.473) 79.727,49.502 ; v1@79.536,48.981 ccw(c79.002,49.473) 79.727,49.502 ; v1@79.536,48.981 ccw(c79.002,49.473) 79.727,49.502 ; v1@79.536,48.981 ccw(c79.002,49.473) 79.727,49.502 ; v1@79.539,48.985 ccw(c78.709,49.815) 79.883,49.815 ; v1@79.539,48.985 ccw(c78.709,49.815) 79.883,49.815 ; v1@79.539,48.985 ccw(c78.709,49.815) 79.883,49.815 ; v1@79.539,48.985 ccw(c78.709,49.815) 79.883,49.815 ; R93.2@79.614,50.531 cw(c78.963,49.88) 79.883,49.88 ; R93.2@79.614,50.531 cw(c78.963,49.88) 79.883,49.88 ; R93.2@79.614,50.531 cw(c78.963,49.88) 79.883,49.88 ; R93.2@79.614,50.531 cw(c78.963,49.88) 79.883,49.88 ; K3.1@79.635,88.401 cw(c80.431,87.606) v1@80.431,88.731 ; K3.1@79.635,88.401 cw(c80.431,87.606) v1@80.431,88.731 ; K3.1@79.635,88.401 cw(c80.431,87.606) v1@80.431,88.731 ; K3.1@79.635,89.06 ccw(c80.431,89.856) v1@80.431,88.731 ; K3.1@79.635,89.06 ccw(c80.431,89.856) v1@80.431,88.731 ; K3.1@79.635,89.06 ccw(c80.431,89.856) v1@80.431,88.731 ; v1@79.75,48.933 cw(c80.368,49.126) 79.808,49.45 ; v1@79.75,48.933 cw(c80.368,49.126) 79.808,49.45 ; v1@79.75,48.933 cw(c80.368,49.126) 79.808,49.45 ; v1@79.75,48.933 cw(c80.368,49.126) 79.808,49.45 ; v1@79.75,48.933 cw(c80.368,49.126) 79.808,49.45 ; v1@79.75,48.933 cw(c80.368,49.126) 79.808,49.45 ; 79.883,49.88 cw(c80.803,49.88) R93.2@80.152,50.531 ; 79.883,49.88 cw(c80.803,49.88) R93.2@80.152,50.531 ; 79.883,49.88 cw(c80.803,49.88) R93.2@80.152,50.531 ; 79.883,49.88 cw(c80.803,49.88) R93.2@80.152,50.531 ; 80.142,88.808 ccw(c80.335,89.529) v1@80.709,88.883 ; 80.142,88.808 ccw(c80.335,89.529) v1@80.709,88.883 ; 80.142,88.808 ccw(c80.335,89.529) v1@80.709,88.883 ; 80.142,88.808 ccw(c80.335,89.529) v1@80.709,88.883 ; 80.142,88.808 ccw(c80.335,89.529) v1@80.709,88.883 ; 80.142,88.808 ccw(c80.335,89.529) v1@80.709,88.883 ; R109.2@80.279,42.403 cw(c80.93,41.752) 80.93,42.672 ; R109.2@80.279,42.403 cw(c80.93,41.752) 80.93,42.672 ; R109.2@80.279,42.403 cw(c80.93,41.752) 80.93,42.672 ; R109.2@80.279,42.403 cw(c80.93,41.752) 80.93,42.672 ; R109.2@80.279,42.941 ccw(c80.93,43.592) 80.93,42.672 ; R109.2@80.279,42.941 ccw(c80.93,43.592) 80.93,42.672 ; R109.2@80.279,42.941 ccw(c80.93,43.592) 80.93,42.672 ; R109.2@80.279,42.941 ccw(c80.93,43.592) 80.93,42.672 ; 80.352,88.71 cw(c80.474,88.257) v1@80.709,88.663 ; 80.352,88.71 cw(c80.474,88.257) v1@80.709,88.663 ; 80.352,88.71 cw(c80.474,88.257) v1@80.709,88.663 ; 80.352,88.71 cw(c80.474,88.257) v1@80.709,88.663 ; 80.352,88.71 cw(c80.474,88.257) v1@80.709,88.663 ; 80.352,88.71 cw(c80.474,88.257) v1@80.709,88.663 ; 80.364,88.731 ccw(c80.364,89.181) v1@80.682,88.863 ; 80.364,88.731 ccw(c80.364,89.181) v1@80.682,88.863 ; 80.364,88.731 ccw(c80.364,89.181) v1@80.682,88.863 ; C66.1@92.441,90.79 cw(c91.827,90.176) 92.695,90.176 ; C66.1@92.441,90.79 cw(c91.827,90.176) 92.695,90.176 ; C66.1@92.441,90.79 cw(c91.827,90.176) 92.695,90.176 ; 92.695,88.661 ccw(c93.487,88.661) v1@92.927,88.101 ; 92.695,88.661 ccw(c93.487,88.661) v1@92.927,88.101 ; 92.695,88.661 ccw(c93.487,88.661) v1@92.927,88.101 ; 92.695,90.102 cw(c93.667,90.102) C66.1@92.979,90.79 ; 92.695,90.102 cw(c93.667,90.102) C66.1@92.979,90.79 ; 92.695,90.102 cw(c93.667,90.102) C66.1@92.979,90.79 ; R111.2@98.791,80.884 cw(c98.14,80.233) 99.06,80.233 ; R111.2@98.791,80.884 cw(c98.14,80.233) 99.06,80.233 ; R111.2@98.791,80.884 cw(c98.14,80.233) 99.06,80.233 ; R111.2@98.791,80.884 cw(c98.14,80.233) 99.06,80.233 ; 99.06,79.734 ccw(c99.8,79.734) v1@99.277,79.211 ; 99.06,79.734 ccw(c99.8,79.734) v1@99.277,79.211 ; 99.06,79.734 ccw(c99.8,79.734) v1@99.277,79.211 ; 99.06,79.734 ccw(c99.8,79.734) v1@99.277,79.211 ; 99.06,80.233 cw(c99.98,80.233) R111.2@99.329,80.884 ; 99.06,80.233 cw(c99.98,80.233) R111.2@99.329,80.884 ; 99.06,80.233 cw(c99.98,80.233) R111.2@99.329,80.884 ; 99.06,80.233 cw(c99.98,80.233) R111.2@99.329,80.884 ; v1@31.123,61.856 ccw(c31.123,63.619) 32.37,62.372 cw(c31.123,63.619) v1@31.123,61.856 ; U3.5@32.204,45.819 ccw(c32.671,45.557) 32.292,45.178 cw(c32.671,45.557) U3.5@32.204,45.819 ; D10.2@58,107.815 ccw(c57.294,108.521) 58.293,108.521 cw(c57.294,108.521) D10.2@58,107.815 ; 58.293,108.409 ccw(c59.134,108.409) 58.539,107.815 cw(c59.134,108.409) 58.293,108.409 ; 63.754,108.909 ccw(c65.302,108.909) 64.207,107.815 cw(c65.302,108.909) 63.754,108.909
  Top Layer w0.762: C41.2@15.367,12.192 v1(15.367,14.859) ; C49.2@23.368,12.192 v1(23.368,14.732) ; C45.2@31.369,12.192 v1(31.369,14.351) ; C40.2@41.402,12.192 v1(41.402,14.351) ; C48.2@49.403,12.192 v1(49.403,14.224) ; v1(56.515,14.351) 57.404,13.462 C44.2@57.404,12.192 ; C39.2@68.453,12.319 68.453,14.224 68.326,14.351 v1(68.453,14.351) ; v1(76.327,14.478) 76.327,14.224 76.454,14.097 C47.2@76.454,12.319 ; 83.312,56.007 84.709,57.404 v1(86.36,57.404) ; C43.2@84.455,12.319 84.455,14.224 v1(84.201,14.478) ; C38.2@93.726,12.319 v1(93.726,14.478) ; C46.2@101.727,12.319 v1(101.727,14.351) ; R106.2@106.172,36.322 v1(109.22,36.322) ; C42.2@109.728,12.319 v1(109.728,14.351) ; v1(84.201,14.478) cw(c83.588,13.865) 84.455,13.865 ; v1(84.201,14.478) cw(c83.588,13.865) 84.455,13.865 ; v1(84.201,14.478) cw(c83.588,13.865) 84.455,13.865 ; v1(84.201,14.478) cw(c83.588,13.865) 84.455,13.865 ; R106.2@106.441,36.053 cw(c107.092,35.402) 107.092,36.322 ; R106.2@106.441,36.053 cw(c107.092,35.402) 107.092,36.322 ; R106.2@106.441,36.053 cw(c107.092,35.402) 107.092,36.322 ; R106.2@106.441,36.053 cw(c107.092,35.402) 107.092,36.322 ; R106.2@106.441,36.591 ccw(c107.092,37.242) 107.092,36.322 ; R106.2@106.441,36.591 ccw(c107.092,37.242) 107.092,36.322 ; R106.2@106.441,36.591 ccw(c107.092,37.242) 107.092,36.322 ; R106.2@106.441,36.591 ccw(c107.092,37.242) 107.092,36.322
  Top Layer w1.016: v3(4.572,10.668) C8.2@4.572,12.573 ; D31.2@27.916,18.438 D32.2@27.916,21.613 27.916,26.948 v1(27.94,26.924) ; D30.2@44.347,18.138 D29.2@44.347,21.313 D28.2@44.347,24.488 43.307,25.527 v3(42.164,25.527) ; v1(46.609,117.221) 47.102,116.728 ; D12.1@49.599,116.728 47.102,116.728 ; D25.2@63.095,20.089 D26.2@63.095,23.264 D27.2@63.095,26.439 63.095,28.805 v1(63.119,28.829) ; v1@66.929,42.164 v1(66.952,42.187) D51.2@66.952,44.347 ; v1(69.469,109.474) 69.7,109.243 D9.2@69.7,107.418 ; D50.2@70.127,44.347 71.604,44.347 v1(72.263,43.688) ; v1(75.692,31.369) C62.2@77.978,31.369 ; v2@76.454,74.168 v2(86.614,74.168) ; v1(81.534,28.067) 81.558,28.043 D22.2@81.558,25.885 D23.2@81.558,22.71 D24.2@81.558,19.535 ; v1(86.36,57.404) R92.2@86.36,59.055 86.36,63.119 v1(86.614,63.373) R78.2@86.614,65.151 v1(86.614,69.469) ; v1(86.36,79.502) R94.1@86.36,81.28 ; v1(88.9,79.502) R99.1@88.9,81.28 ; v1(91.313,79.375) 91.44,79.502 R101.1@91.44,81.28 ; v1(93.98,79.502) R100.1@93.98,81.28 ; v1(109.22,36.322) 110.998,36.322 C69.1@111.379,36.703 ; v3(42.164,25.527) cw(c42.164,23.259) D28.2@44.111,24.423 ; v3(42.164,25.527) cw(c42.164,23.259) D28.2@44.111,24.423 ; v3(42.164,25.527) cw(c42.164,23.259) D28.2@44.111,24.423 ; v3(42.164,25.527) cw(c42.164,23.259) D28.2@44.111,24.423 ; v1@46.487,117.184 ccw(c47.102,117.37) 47.102,116.728 ; v1@46.487,117.184 ccw(c47.102,117.37) 47.102,116.728 ; v1@46.487,117.184 ccw(c47.102,117.37) 47.102,116.728 ; v1@46.487,117.184 ccw(c47.102,117.37) 47.102,116.728 ; v1@46.519,117.131 ccw(c47.492,118.104) 47.492,116.728 ; v1@46.519,117.131 ccw(c47.492,118.104) 47.492,116.728 ; v1@46.519,117.131 ccw(c47.492,118.104) 47.492,116.728 ; v1@46.519,117.131 ccw(c47.492,118.104) 47.492,116.728 ; 48.298,116.728 cw(c48.298,115.808) D12.1@48.948,116.459 ; 48.298,116.728 ccw(c48.298,117.648) D12.1@48.948,116.998 ; 48.298,116.728 cw(c48.298,115.808) D12.1@48.948,116.459 ; 48.298,116.728 ccw(c48.298,117.648) D12.1@48.948,116.998 ; 48.298,116.728 cw(c48.298,115.808) D12.1@48.948,116.459 ; 48.298,116.728 ccw(c48.298,117.648) D12.1@48.948,116.998 ; 48.298,116.728 cw(c48.298,115.808) D12.1@48.948,116.459 ; 48.298,116.728 ccw(c48.298,117.648) D12.1@48.948,116.998 ; 86.36,63.066 cw(c86.921,63.066) v1@86.524,63.463 ; 86.36,63.066 cw(c86.921,63.066) v1@86.524,63.463 ; 86.36,63.066 cw(c86.921,63.066) v1@86.524,63.463 ; 86.36,63.066 cw(c86.921,63.066) v1@86.524,63.463 ; 110.459,36.322 ccw(c110.459,37.496) C69.1@111.289,36.666 ; 110.459,36.322 ccw(c110.459,37.496) C69.1@111.289,36.666 ; 110.459,36.322 ccw(c110.459,37.496) C69.1@111.289,36.666 ; 110.459,36.322 ccw(c110.459,37.496) C69.1@111.289,36.666
  Top Layer w1.27: D13.1@23.761,109.605 23.761,108.724 22.352,107.315 ; U2.0@19.288,99.324 cw(c23.656,98.32) U2.0@23.656,102.802 ; U2.0@19.288,99.324 cw(c23.656,98.32) U2.0@23.656,102.802 ; U2.0@19.288,99.324 cw(c23.656,98.32) U2.0@23.656,102.802 ; U2.0@19.288,99.324 cw(c23.656,98.32) U2.0@23.656,102.802 ; C12.2@19.431,107.315 ccw(c19.431,111.51) D13.1@23.096,109.468 ; C12.2@19.431,107.315 ccw(c19.431,111.51) D13.1@23.096,109.468 ; C12.2@19.431,107.315 ccw(c19.431,111.51) D13.1@23.096,109.468 ; C12.2@19.431,107.315 ccw(c19.431,111.51) D13.1@23.096,109.468 ; C12.2@19.431,107.315 22.352,107.315 ; U2.0@20.526,99.04 cw(c25.251,97.954) 25.251,102.802 ; U2.0@20.526,99.04 cw(c25.251,97.954) 25.251,102.802 ; U2.0@20.526,99.04 cw(c25.251,97.954) 25.251,102.802 ; U2.0@20.526,99.04 cw(c25.251,97.954) 25.251,102.802 ; U2.0@21.04,97.355 cw(c25.601,93.292) 25.601,99.4 ; U2.0@21.04,97.355 cw(c25.601,93.292) 25.601,99.4 ; U2.0@21.04,97.355 cw(c25.601,93.292) 25.601,99.4 ; U2.0@21.04,97.355 cw(c25.601,93.292) 25.601,99.4 ; U2.0@21.087,101.524 ccw(c25.684,105.437) 25.684,99.4 ; U2.0@21.087,101.524 ccw(c25.684,105.437) 25.684,99.4 ; U2.0@21.087,101.524 ccw(c25.684,105.437) 25.684,99.4 ; U2.0@21.087,101.524 ccw(c25.684,105.437) 25.684,99.4 ; 21.568,107.893 cw(c22.928,106.574) D13.1@23.522,108.373 ; 21.568,107.893 cw(c22.928,106.574) D13.1@23.522,108.373 ; 21.568,107.893 cw(c22.928,106.574) D13.1@23.522,108.373 ; 21.568,107.893 cw(c22.928,106.574) D13.1@23.522,108.373 ; 21.568,107.893 cw(c22.928,106.574) D13.1@23.522,108.373 ; 21.568,107.893 cw(c22.928,106.574) D13.1@23.522,108.373 ; 21.593,107.315 ccw(c21.593,110.305) D13.1@24.205,108.849 ; 21.593,107.315 ccw(c21.593,110.305) D13.1@24.205,108.849 ; 21.593,107.315 ccw(c21.593,110.305) D13.1@24.205,108.849 ; 21.593,107.315 ccw(c21.593,110.305) D13.1@24.205,108.849 ; U2.0@21.763,98.755 cw(c26.846,97.587) 26.846,102.802 ; U2.0@21.763,98.755 cw(c26.846,97.587) 26.846,102.802 ; U2.0@21.763,98.755 cw(c26.846,97.587) 26.846,102.802 ; U2.0@21.763,98.755 cw(c26.846,97.587) 26.846,102.802 ; U2.0@21.988,96.51 cw(c28.433,90.77) U2.3@28.433,99.4 ; U2.0@21.988,96.51 cw(c28.433,90.77) U2.3@28.433,99.4 ; U2.0@21.988,96.51 cw(c28.433,90.77) U2.3@28.433,99.4 ; U2.0@21.988,96.51 cw(c28.433,90.77) U2.3@28.433,99.4 ; U2.0@22.054,102.347 ccw(c28.433,107.776) U2.3@28.433,99.4 ; U2.0@22.054,102.347 ccw(c28.433,107.776) U2.3@28.433,99.4 ; U2.0@22.054,102.347 ccw(c28.433,107.776) U2.3@28.433,99.4 ; U2.0@22.054,102.347 ccw(c28.433,107.776) U2.3@28.433,99.4 ; 22.352,107.315 ccw(c20.773,108.894) D13.1@23.001,109.045 ; 22.352,107.315 ccw(c20.773,108.894) D13.1@23.001,109.045 ; 22.352,107.315 ccw(c20.773,108.894) D13.1@23.001,109.045 ; 22.352,107.315 ccw(c20.773,108.894) D13.1@23.001,109.045 ; U2.0@23.001,98.471 cw(c28.441,97.22) U2.5@28.441,102.802 ; U2.0@23.001,98.471 cw(c28.441,97.22) U2.5@28.441,102.802 ; U2.0@23.001,98.471 cw(c28.441,97.22) U2.5@28.441,102.802 ; U2.0@23.001,98.471 cw(c28.441,97.22) U2.5@28.441,102.802 ; U2.3@28.433,99.4 18.735,99.4 U2.0@18.669,99.466 22.005,102.802 U2.5@28.441,102.802
  Bottom Layer w0.254: v1(56.261,70.866) 57.15,71.755 58.547,71.755 v1(59.436,70.866) ; v1@56.261,71.12 ccw(c56.261,71.733) 56.695,71.3 ccw(c57.128,70.866) v1@56.515,70.866 ; v1(56.515,59.944) 57.328,59.131 59.385,59.131 60.198,59.944 ; v1@59.182,70.866 ccw(c58.569,70.866) 59.002,71.3 ccw(c59.436,71.733) v1@59.436,71.12 ; C1.2@59.839,61.109 cw(c58.972,60.242) 60.198,60.242 cw(c61.424,60.242) C1.2@60.557,61.109 ; C1.2@60.198,60.96 60.198,59.944 ; v1@61.341,66.294 v1@61.595,66.548 ; C3.2@64.262,61.849 64.262,60.579 v1(64.643,60.198) ; v1@56.515,59.69 cw(c56.515,59.077) 56.949,59.51 ; v1@56.515,59.69 cw(c56.515,59.077) 56.949,59.51 ; v1@56.515,59.69 cw(c56.515,59.077) 56.949,59.51 ; v1@56.515,59.69 cw(c56.515,59.077) 56.949,59.51 ; v1@56.769,59.944 ccw(c57.382,59.944) 56.949,59.51 ; v1@56.769,59.944 ccw(c57.382,59.944) 56.949,59.51 ; v1@56.769,59.944 ccw(c57.382,59.944) 56.949,59.51 ; v1@56.769,59.944 ccw(c57.382,59.944) 56.949,59.51 ; C1.2@59.893,60.554 cw(c59.436,59.944) 60.198,59.944 ; C1.2@59.893,60.554 cw(c59.436,59.944) 60.198,59.944 ; C1.2@59.893,60.554 cw(c59.436,59.944) 60.198,59.944 ; 60.198,59.944 cw(c60.96,59.944) C1.2@60.503,60.554 ; 60.198,59.944 cw(c60.96,59.944) C1.2@60.503,60.554 ; 60.198,59.944 cw(c60.96,59.944) C1.2@60.503,60.554 ; C3.2@63.903,61.49 cw(c63.036,60.623) 64.262,60.623 ; C3.2@63.903,61.49 cw(c63.036,60.623) 64.262,60.623 ; C3.2@63.903,61.49 cw(c63.036,60.623) 64.262,60.623 ; C3.2@63.903,61.49 cw(c63.036,60.623) 64.262,60.623 ; 64.262,60.623 cw(c65.488,60.623) C3.2@64.621,61.49 ; 64.262,60.623 cw(c65.488,60.623) C3.2@64.621,61.49 ; 64.262,60.623 cw(c65.488,60.623) C3.2@64.621,61.49 ; 64.262,60.623 cw(c65.488,60.623) C3.2@64.621,61.49
  Bottom Layer w0.508: C68.2@51.308,47.625 52.324,46.609 52.324,43.942 v1(52.451,43.815) ; v1(56.388,43.942) C28.2@56.388,47.625 ; C1.2@60.198,61.468 R24.1@60.198,63.5 v1(61.849,63.5) ; v3(69.342,111.76) 70.739,111.76 71.12,111.379 C4.2@71.12,110.109 ; v1(74.803,89.027) 76.2,87.63 C2.1@76.2,85.979 ; C68.2@51.308,47.117 cw(c51.308,45.891) 52.175,46.758 ; C68.2@51.308,47.117 cw(c51.308,45.891) 52.175,46.758 ; C68.2@51.308,47.117 cw(c51.308,45.891) 52.175,46.758 ; C68.2@51.689,47.498 ccw(c52.302,47.498) C68.2@51.869,47.064 ; C68.2@51.689,47.498 ccw(c52.302,47.498) C68.2@51.869,47.064 ; C68.2@51.689,47.498 ccw(c52.302,47.498) C68.2@51.869,47.064 ; 52.324,44.428 ccw(c53.064,44.428) v1@52.541,43.905 ; 52.324,44.428 ccw(c53.064,44.428) v1@52.541,43.905 ; 52.324,44.428 ccw(c53.064,44.428) v1@52.541,43.905 ; C28.2@56.119,47.229 cw(c55.468,46.578) 56.388,46.578 ; C28.2@56.119,47.229 cw(c55.468,46.578) 56.388,46.578 ; C28.2@56.119,47.229 cw(c55.468,46.578) 56.388,46.578 ; 56.388,46.578 cw(c57.308,46.578) C28.2@56.657,47.229 ; 56.388,46.578 cw(c57.308,46.578) C28.2@56.657,47.229 ; 56.388,46.578 cw(c57.308,46.578) C28.2@56.657,47.229 ; C1.2@59.929,61.229 ccw(c59.278,61.88) 60.198,61.88 ; C1.2@59.929,61.229 ccw(c59.278,61.88) 60.198,61.88 ; C1.2@59.929,61.229 ccw(c59.278,61.88) 60.198,61.88 ; R24.1@59.929,63.231 cw(c59.278,62.58) 60.198,62.58 ; R24.1@59.929,63.231 cw(c59.278,62.58) 60.198,62.58 ; R24.1@59.929,63.231 cw(c59.278,62.58) 60.198,62.58 ; 60.198,61.88 ccw(c61.118,61.88) C1.2@60.467,61.229 ; 60.198,61.88 ccw(c61.118,61.88) C1.2@60.467,61.229 ; 60.198,61.88 ccw(c61.118,61.88) C1.2@60.467,61.229 ; 60.198,62.58 cw(c61.118,62.58) R24.1@60.467,63.231 ; 60.198,62.58 cw(c61.118,62.58) R24.1@60.467,63.231 ; 60.198,62.58 cw(c61.118,62.58) R24.1@60.467,63.231 ; R24.1@60.594,63.231 cw(c61.245,62.58) 61.245,63.5 ; R24.1@60.594,63.231 cw(c61.245,62.58) 61.245,63.5 ; R24.1@60.594,63.231 cw(c61.245,62.58) 61.245,63.5 ; R24.1@60.594,63.769 ccw(c61.245,64.42) 61.245,63.5 ; R24.1@60.594,63.769 ccw(c61.245,64.42) 61.245,63.5 ; R24.1@60.594,63.769 ccw(c61.245,64.42) 61.245,63.5 ; v3@69.477,111.625 cw(c69.802,111.3) 69.802,111.76 ; v3@69.477,111.625 cw(c69.802,111.3) 69.802,111.76 ; v3@69.477,111.625 cw(c69.802,111.3) 69.802,111.76 ; v3@69.477,111.895 ccw(c69.802,112.22) 69.802,111.76 ; v3@69.477,111.895 ccw(c69.802,112.22) 69.802,111.76 ; v3@69.477,111.895 ccw(c69.802,112.22) 69.802,111.76 ; C4.2@70.851,110.505 ccw(c70.2,111.156) 71.12,111.156 ; C4.2@70.851,110.505 ccw(c70.2,111.156) 71.12,111.156 ; C4.2@70.851,110.505 ccw(c70.2,111.156) 71.12,111.156 ; 71.12,111.156 ccw(c72.04,111.156) C4.2@71.389,110.505 ; 71.12,111.156 ccw(c72.04,111.156) C4.2@71.389,110.505 ; 71.12,111.156 ccw(c72.04,111.156) C4.2@71.389,110.505 ; C2.1@75.931,86.375 ccw(c75.28,87.026) 76.2,87.026 ; C2.1@75.931,86.375 ccw(c75.28,87.026) 76.2,87.026 ; C2.1@75.931,86.375 ccw(c75.28,87.026) 76.2,87.026 ; 76.2,87.026 ccw(c77.12,87.026) C2.1@76.469,86.375 ; 76.2,87.026 ccw(c77.12,87.026) C2.1@76.469,86.375 ; 76.2,87.026 ccw(c77.12,87.026) C2.1@76.469,86.375
  Bottom Layer w0.762: C9.2@58.039,66.294 C11.2@60.325,66.294 61.341,66.294 C5.1@62.738,66.294 C14.2@65.151,66.294 v1(66.802,66.294)
  Bottom Layer w1.016: v1(86.614,69.469) v2(86.614,74.168) 86.614,79.248 86.868,79.502 v1(88.9,79.502) v1(93.98,79.502) ; v1(110.109,17.018) C22.1@110.109,21.59 C23.1@110.109,24.13 C24.1@110.109,26.67 C25.1@110.109,29.21 C27.1@110.109,31.75 v1(110.109,34.163) ; v1@86.45,79.592 cw(c86.053,79.195) 86.614,79.195 ; v1@86.45,79.592 cw(c86.053,79.195) 86.614,79.195 ; v1@86.45,79.592 cw(c86.053,79.195) 86.614,79.195
  other v1: 69.977,17.653 64.516,17.78 66.294,18.161 64.643,34.417 65.786,34.417 53.213,39.031 21.59,39.497 12.954,39.751 18.415,42.926 20.193,43.815 43.942,45.212 16.891,45.339 79.502,45.339 14.986,46.228 18.669,46.863 21.082,46.99 44.069,48.006 76.962,48.641 78.105,48.641 15.875,48.768 19.939,49.022 44.069,50.165 79.502,53.34 30.988,61.849 26.67,62.484 21.59,66.294 59.182,66.294 61.595,66.294 63.944,66.294 16.51,66.421 19.177,66.548 23.114,66.548 2.159,68.707 1.651,70.358 77.851,71.374 79.248,71.374 76.454,71.501 71.247,72.009 54.483,72.136 71.12,73.787 52.959,76.2 51.308,76.454 58.039,77.597 2.159,78.359 58.166,79.629 51.435,80.137 53.467,80.391 51.054,83.185 53.34,83.185 45.466,84.963 51.181,85.598 53.086,86.106 51.181,87.376 98.044,87.376 45.733,87.757 53.34,88.138 51.562,88.519 36.195,88.9 45.847,91.186 1.651,91.44 10.541,91.694 7.112,91.821 76.2,93.345 48.768,93.599 45.212,93.726 51.943,94.488 44.831,95.504 11.049,95.631 12.446,95.631 11.049,96.774 12.446,96.901 11.049,105.283 12.065,105.283
  other v2: 7.366,0.762 86.233,0.889 60.579,1.143 33.02,1.524 86.36,3.937 60.325,4.826 33.02,5.08 115.316,8.509 112.522,8.636 118.364,8.763 115.951,15.367 53.467,17.78 53.467,19.685 53.34,21.463 53.34,22.987 30.988,27.051 24.892,27.178 81.661,31.623 84.836,31.75 83.185,33.274 81.534,34.925 84.836,34.925 77.47,59.309 79.629,59.309 89.408,73.914 92.202,74.041 94.996,74.041 76.708,74.168 78.359,74.168 80.01,74.168
HEARTBEAT1: R117.1 U5.70 | length 12.5
  Top Layer w0.254: U5.70@65.222,57.601 65.222,55.047 66.294,53.975 66.675,53.975 66.929,53.721 R117.1@66.929,51.816 ; R117.1@66.57,52.302 ccw(c65.703,53.169) 66.929,53.169 ; R117.1@66.57,52.302 ccw(c65.703,53.169) 66.929,53.169 ; R117.1@66.57,52.302 ccw(c65.703,53.169) 66.929,53.169 ; 66.929,53.169 ccw(c68.155,53.169) R117.1@67.288,52.302 ; 66.929,53.169 ccw(c68.155,53.169) R117.1@67.288,52.302 ; 66.929,53.169 ccw(c68.155,53.169) R117.1@67.288,52.302
HEARTBEAT2: R116.1 U5.71 | length 15.2
  Top Layer w0.254: U5.71@65.722,57.601 65.722,55.436 66.675,54.483 69.85,54.483 70.104,54.229 R116.1@70.104,51.816 ; R116.1@69.745,52.302 ccw(c68.878,53.169) 70.104,53.169 ; R116.1@69.745,52.302 ccw(c68.878,53.169) 70.104,53.169 ; R116.1@69.745,52.302 ccw(c68.878,53.169) 70.104,53.169 ; 70.104,53.169 ccw(c71.33,53.169) R116.1@70.463,52.302 ; 70.104,53.169 ccw(c71.33,53.169) R116.1@70.463,52.302 ; 70.104,53.169 ccw(c71.33,53.169) R116.1@70.463,52.302